# Altium PCB Klon.PcbDoc
Units mil, origin at the board's own origin, x right, y up, seen from the top; angles counter-clockwise.
Board outline 2140 x 2260 mil, 2 copper layers (Top Layer, Bottom Layer); 63 components, 40 nets, 155 pads, 21 vias.
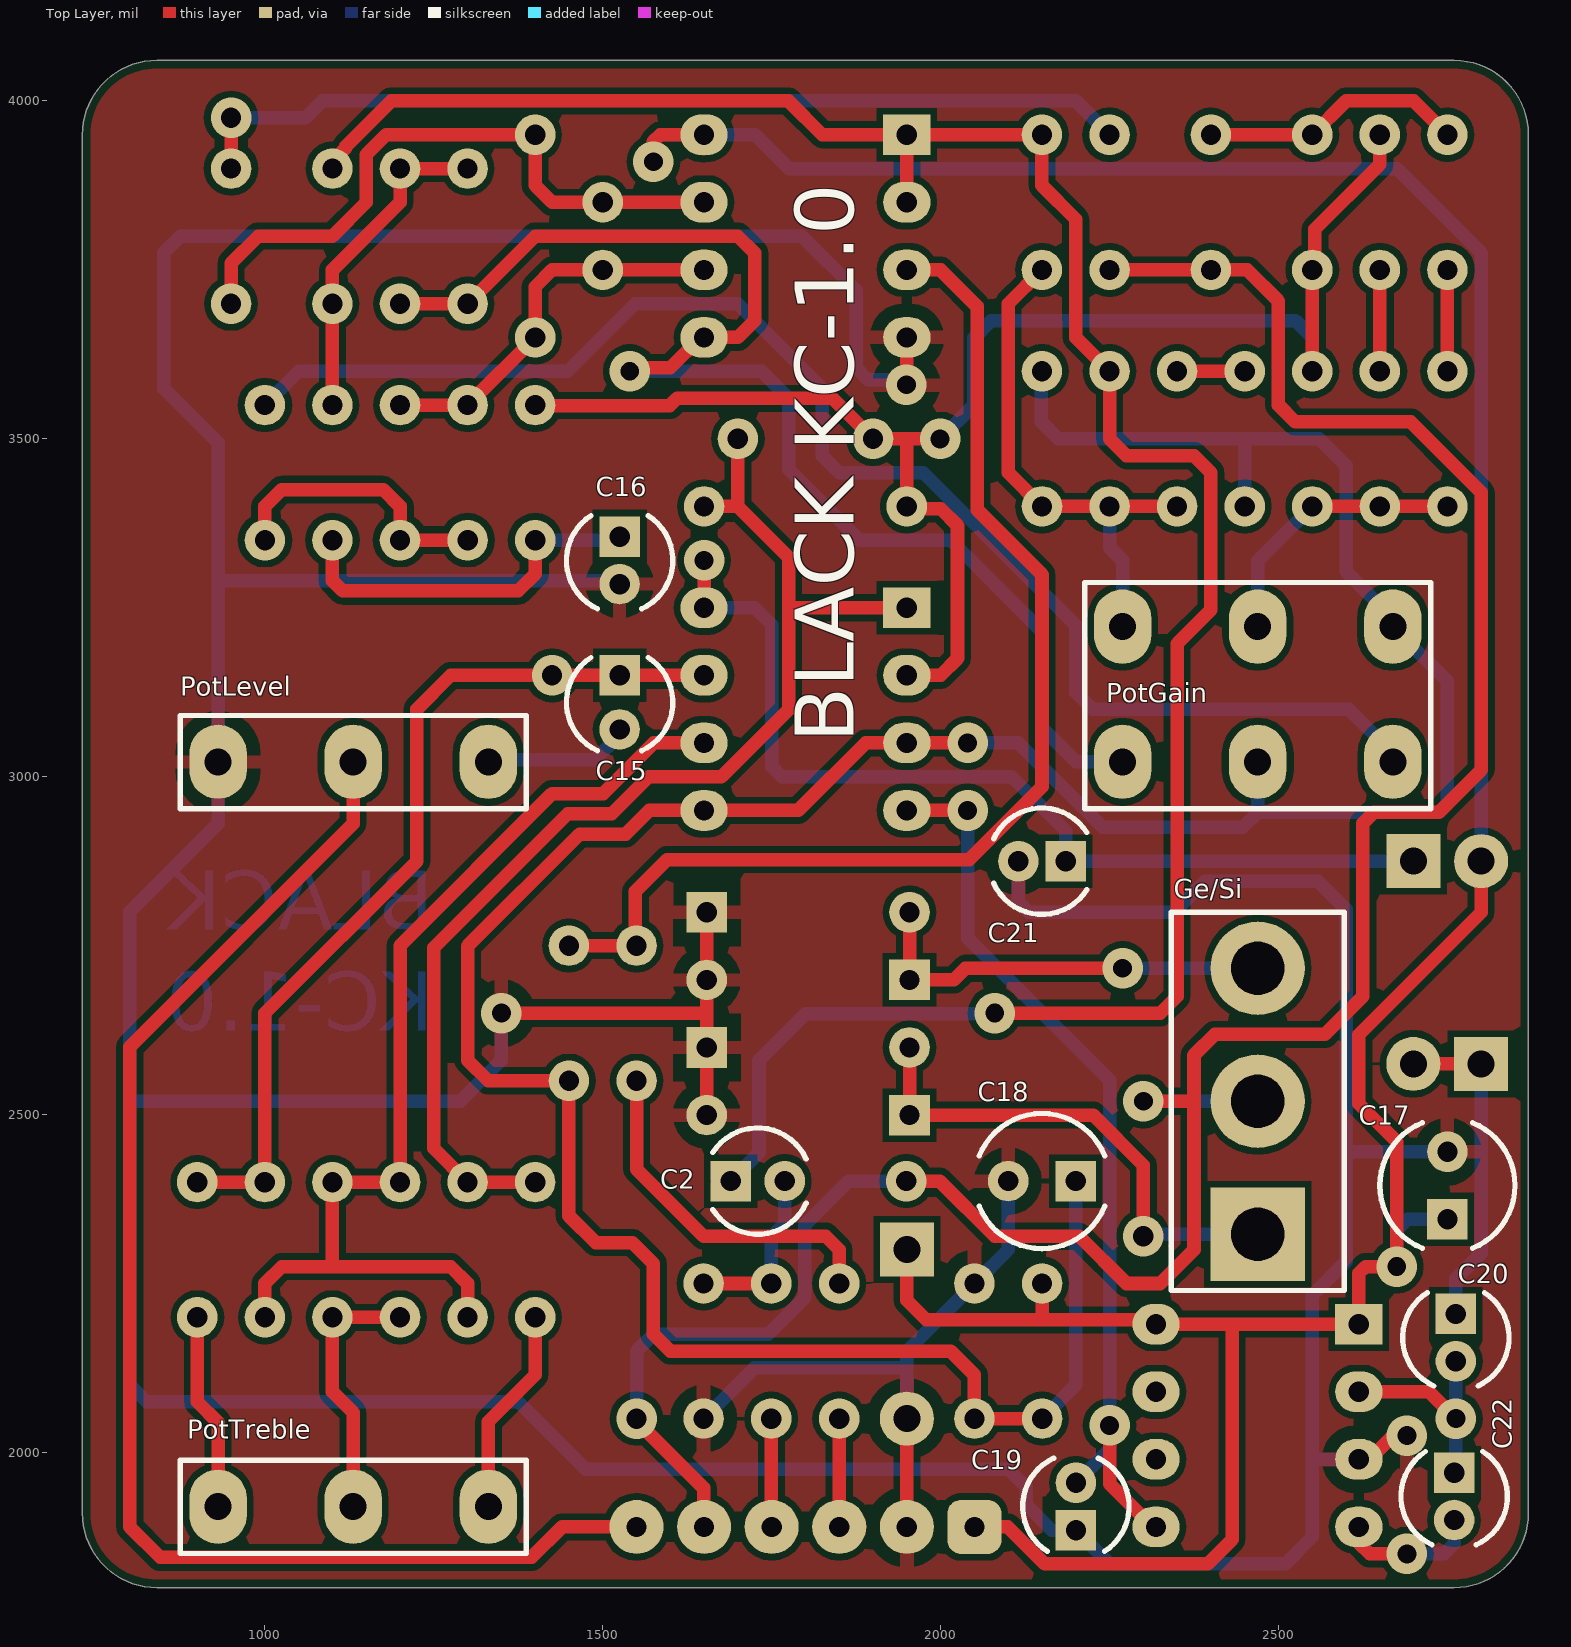
[diagram p0: Top Layer view]
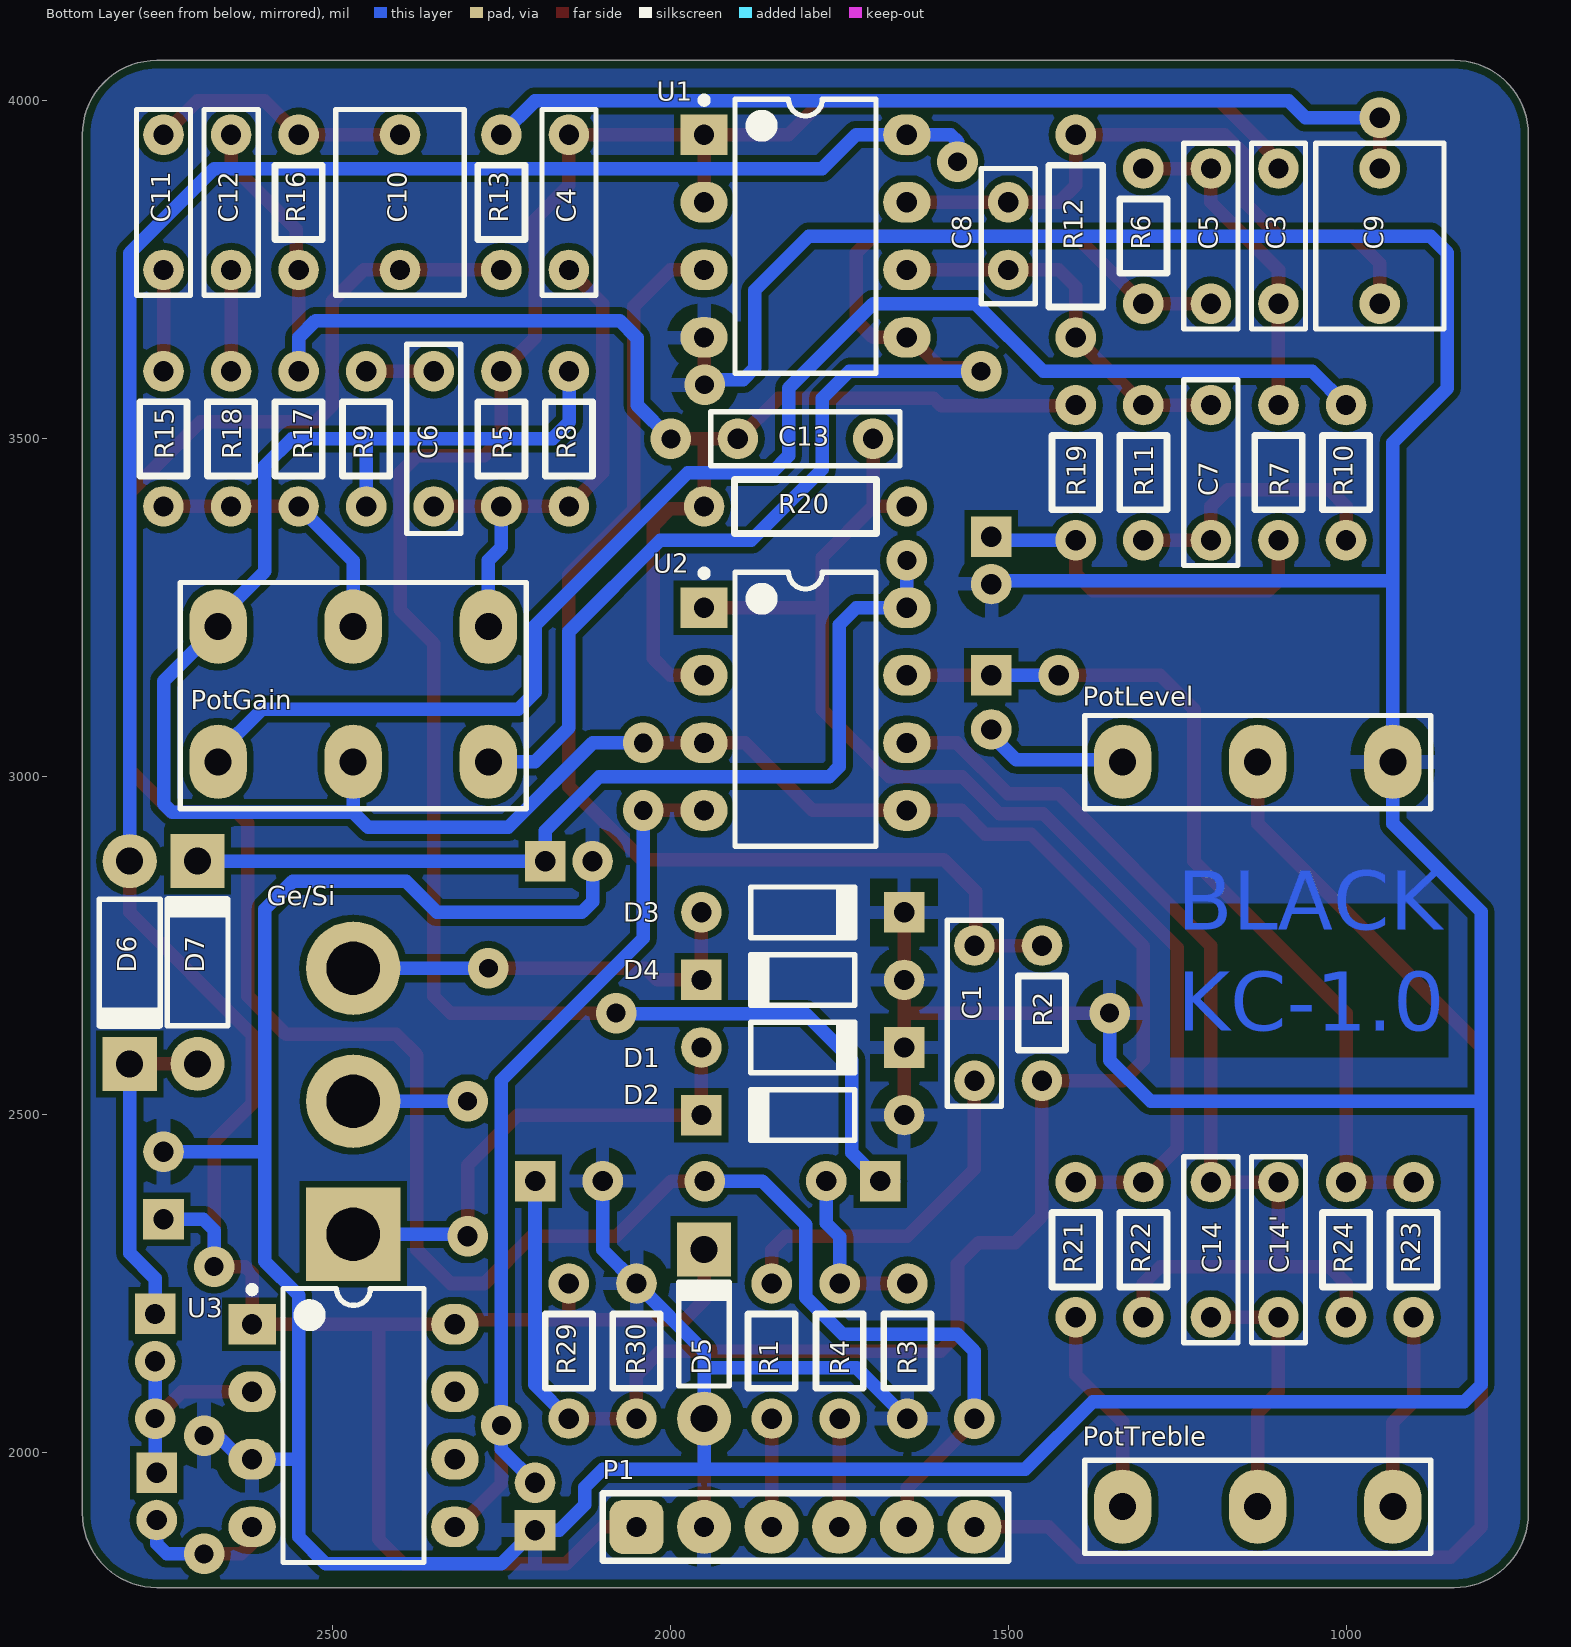
[diagram p1: Bottom Layer view, seen from below]

## Layer stack, top to bottom
Top Solder: solder mask 0.4, Solder Resist, Dk 3.5
Top Layer: signal copper 1.4
Dielectric 1: dielectric 12.6, FR-4, Dk 4.8
Bottom Layer: signal copper 1.4
Bottom Solder: solder mask 0.4, Solder Resist, Dk 3.5

## Board outline
2760,4060 840,4060 ccw(c840,3950) 730,3950 730,1910 ccw(c840,1910) 840,1800 2759.85,1800 ccw(c2760,1910) 2870,1910 2870,3950 ccw(c2760,3950)

## Design rules (kind name [scope] priority, off if disabled: settings)
BoardOutlineClearance [All] p1: gap=12 ignorepadtopadclearanceinfootprint=FALSE
Clearance [All] p1: gap=10 ignorepadtopadclearanceinfootprint=TRUE
ComponentClearance [All] p1: gap=10 collisioncheckmode=3 verticalgap=-10 showdistances=FALSE
Height [All] p1: minheight=0 maxheight=2000 prefheight=500
HoleSize [All] p1: absolutevalues=TRUE maxlimit=100 minlimit=28 maxpercent=80.000 minpercent=20.000
MinimumSolderMaskSliver [All] p1: minsoldermaskwidth=2
PermittedLayers [All] p1: toplayerpermitted=TRUE bottomlayerpermitted=TRUE
PolygonConnect [All] p1: connectstyle=Relief reliefconductorwidth=20 reliefentries=4 polygonreliefangle="90 Angle" airgapwidth=20
RoomDefinition Klon [InComponentClass('Klon')] p1: confinementstyle=ConfineIn formatcopy=TRUE lockcomponents=FALSE outline 395,1535.43 3200,1535.43 3200,4115 395,4115
RoutingCorners [All] p1: cornerstyle=Round minsetback=100 maxsetback=100
RoutingVias [All] p1: holewidth=30 width=60 viastyle="Through Hole" minholewidth=28 minwidth=60 maxholewidth=30 maxwidth=80
SilkToSilkClearance [All] p1: silktosilkclearance=1
SilkToSolderMaskClearance [IsPad] p1: minsilkscreentomaskgap=2 clearancetoexposedcopper=TRUE
SolderMaskExpansion [All] p1: expansion=4
Width [All] p1: maxlimit=20 minlimit=16 preferedwidth=20
23 further rules are at their usual default settings.

## Components (designator, comment, footprint, x,y, rotation, side; value= is the part's Value field where it differs from the comment)
C1 "Cap" "Cap Box 0.2" 1550,2650 r90 bottom value=0.1u
C2 "Cap Pol1" "Cap Pol 80mil" 1729.33,2401.57 r0 top value=4u7
C3 "Cap" "Cap Box 0.2" 1100,3800 r270 bottom value=0.1uF
C4 "Cap" "Cap Box 0.2" 2150,3850 r90 bottom value=68n
C5 "Cap" "Cap Box 0.2" 1200,3800 r90 bottom value=68n
C6 "Cap" "Cap Polyester 200mil" 2350,3500 r270 bottom value=390n
C7 "Cap" "Cap Box 0.2" 1200,3450 r90 bottom value=82n
C8 "Cap" "Cap Ceramic" 1500,3800 r90 bottom value=390p
C9 "Cap" "Cap Box 0.2 FAT H400Mil" 950,3800 r90 bottom value=1uF
C10 "Cap" "Cap Box 0.2 FAT H400Mil" 2400,3850 r90 bottom value=1uF
C11 "Cap" "Cap Box 0.2" 2750,3850 r270 bottom value=2.2n
C12 "Cap" "Cap Box 0.2" 2650,3850 r90 bottom value=27n
C13 "Cap" "Cap Ceramic Multilayer" 1800,3500 r0 bottom value=820p
C14 "Cap" "Cap Box 0.2" 1200,2300 r270 bottom value=3n9
C14' "Cap" "Cap Box 0.2 Socket" 1100,2300 r270 bottom value=3n9
C15 "Cap Pol1" "Cap Pol 80mil" 1525,3110 r270 top value=4u7
C16 "Cap Pol1" "Cap Pol 60mil" 1525,3320 r270 top value=1uF
C17 "Cap Pol1" "Cap Pol 100mil" 2750,2395 r90 top value=47uF
C18 "Cap Pol1" "Cap Pol 100mil" 2150,2401.57 r180 top value=47uF
C19 "Cap Pol1" "Cap Pol 60mil" 2200.24,1920 r90 top value=1uF
C20 "Cap Pol1" "Cap Pol 60mil" 2762.5,2170 r270 top value=1uF
C21 "Cap Pol1" "Cap Pol 60mil" 2150.06,2875 r180 top value=1uF
C22 "Cap Pol1" "Cap Pol 60mil" 2760,1935 r270 top value=1uF
D1 "1N34A" "DO35 Germanio" 1803.99,2599.27 r180 bottom
D2 "1N34A" "DO35 Germanio" 1803.99,2499.27 r0 bottom
D3 "1N4148" DO35 1803.99,2799.27 r180 bottom
D4 "1N4148" DO35 1803.99,2699.27 r0 bottom
D5 "1N4742" "DO41 Zener 250mils" 1950,2175 r90 bottom
D6 "1N4001" DO41 2800,2725 r270 bottom
D7 "1N4001" DO41 2699.53,2725 r90 bottom
Ge/Si "Mod Clipping" "SWITCH SPDT 5mm" 2469.29,2519.68 r180 top
P1 "Header 6" "Header 6" 2050,1889.76 r180 bottom locked
PotGain "RPot Dual Gang" "POT DUAL" 2469.29,3622.05 r0 top locked value=1K
PotLevel "RPot" POT 1130.71,3622.05 r0 top locked value=1K
PotTreble "RPot" POT 1130.71,2519.68 r0 top locked value=1K
R1 "Res1" "Res 0.2" 1850,2050 r90 bottom value=10k
R2 "Res1" "Res 0.2" 1450,2550 r90 bottom value=1Meg
R3 "Res1" "Res 0.2" 1649.27,2050 r90 bottom value=100k
R4 "Res1" "Res 0.2" 1749.33,2050 r90 bottom value=560
R5 "Res1" "Res 0.2" 2250.06,3400 r90 bottom value=5k1
R6 "Res1" "Res 0.2" 1300.06,3700 r90 bottom value=10k
R7 "Res1" "Res 0.2" 1099.94,3550 r270 bottom value=1k5
R8 "Res1" "Res 0.2" 2150,3600 r270 bottom value=1k5
R9 "Res1" "Res 0.2" 2450.06,3400 r90 bottom value=1k
R10 "Res1" "Res 0.2" 1000,3550 r270 bottom value=2k
R11 "Res1" "Res 0.2" 1300,3550 r270 bottom value=15k
R12 "Res1" "Res 0.3" 1400,3950 r270 bottom value=422k
R13 "Res1" "Res 0.2" 2250,3950 r270 bottom value=1K
R15 "Res1" "Res 0.2" 2750.06,3400 r90 bottom value=22k
R16 "Res1" "Res 0.2" 2550.06,3750 r90 bottom value=47k
R17 "Res1" "Res 0.2" 2550.06,3400 r90 bottom value=27k
R18 "Res1" "Res 0.2" 2650.06,3400 r90 bottom value=12k
R19 "Res1" "Res 0.2" 1400,3350 r90 bottom value=15k
R20 "Res1" "Res 0.3" 1650,3400 r0 bottom value=392k
R21 "Res1" "Res 0.2" 1400,2200 r90 bottom value=1k8
R22 "Res1" "Res 0.2" 1300,2200 r90 bottom value=100k
R23 "Res1" "Res 0.2" 900,2400 r270 bottom value=4k7
R24 "Res1" "Res 0.2" 1000,2400 r270 bottom value=100k
R29 "Res1" "Res 0.2" 2150.24,2050 r90 bottom value=27k
R30 "Res1" "Res 0.2" 2050.06,2250 r270 bottom value=27k
U1 "TL072P" DIP8 1800,3800 r180 bottom
U2 "TL072P" DIP8 1800,3100 r180 bottom
U3 "MAX1044" DIP8 2468.9,2039.76 r180 bottom value=Value

## Footprints (in the part's own frame and the unit in brackets; to place one, negate y for a bottom-side part, rotate by r counter-clockwise, add the part's x,y. Pads: shape width x height; smd on the part's side, far side on the other; paste and mask are expansions set on the pad)
"Cap Box 0.2" [mil]
  round 60 hole 30: 1(-100,0) 2(100,0)
  silkscreen extent -138,-40 138,40, body extent -138,-40 138,40, height 240
"Cap Box 0.2 FAT H400Mil" [mil]
  round 60 hole 30: 1(-100,0.01) 2(100,0.01)
  silkscreen extent -138,-95 138,95, body extent -138,-95 138,95, height 400
"Cap Box 0.2 Socket" [mil]
  round 60 hole 30: 1(-100,0) 2(100,0)
  silkscreen extent -138,-40 138,40, body extent -120,-20 120,20, height 61
"Cap Ceramic" [mil]
  round 60 hole 30: 1(-50,0) 2(50,0)
  silkscreen extent -100,-40 100,40, body extent -60,-13 60,12, height 100
"Cap Ceramic Multilayer" [mil]
  round 60 hole 30: 1(-100,0) 2(100,0)
  silkscreen extent -140,-40 140,40, body extent -110,-20 110,20, height 185
"Cap Pol 60mil" [mil]
  rect 60x60 hole 30: 1(-35,0)
  round 60 hole 30: 2(35,0)
  silkscreen extent -66,-79 72,79, body extent -78,-78 80,78, height 438
"Cap Pol 80mil" [mil]
  rect 60x60 hole 30: 1(-40,0)
  round 60 hole 30: 2(40,0)
  silkscreen extent -66,-79 72,79, body extent -78,-78 80,78, height 438
"Cap Pol 100mil" [mil]
  rect 60x60 hole 30: 1(-50,0)
  round 60 hole 30: 2(50,0)
  silkscreen extent -93,-100 93,100, body extent -100,-100 102,100, height 438
"Cap Polyester 200mil" [mil]
  round 60 hole 30: 1(-100,0) 2(100,0)
  silkscreen extent -140,-40 140,40, body extent -114,-40 114,40, height 300
DIP8 [mil]
  rect 70x60 hole 30: 1(-150,150)
  oval 70x60 hole 30: 2(-150,50) 3(-150,-50) 4(-150,-150) 5(150,-150) 6(150,-50) 7(150,50) 8(150,150)
  silkscreen extent -155,-203 104,206, body extent -155,-203 155,203, height 190
DO35 [mil]
  round 60 hole 30: 1(-150,0)
  rect 60x60 hole 30: 2(150,0)
  silkscreen extent -77,-37 81,37, body extent -160,-40 160,40, height 80
"DO35 Germanio" [mil]
  round 60 hole 30: 1(-150,0)
  rect 60x60 hole 30: 2(150,0)
  silkscreen extent -77,-37 81,37, body extent -160,-40 160,40, height 80
DO41 [mil]
  round 80 hole 40: 1(-150,0)
  rect 80x80 hole 40: 2(150,0)
  silkscreen extent -93,-45 98,45, body extent -165,-48 165,48, height 103
"DO41 Zener 250mils" [mil]
  round 80 hole 40: 1(-125,0)
  rect 80x80 hole 40: 2(125,0)
  silkscreen extent -77,-37 81,38, body extent -140,-50 140,50, height 90
"Header 6" [mil]
  rrect50% 80x80 hole 30: 1(0,0)
  round 80 hole 30: 2(100,0) 3(200,0) 4(300,0) 5(400,0) 6(500,0)
  silkscreen extent -50,-50 550,50, body extent -50,-50 550,50, height 400
POT [mil]
  oval 85x110 hole 40: 1(-200,-600) 2(0,-600) 3(200,-600)
  silkscreen extent -256,-669 256,-531, body extent -400,-607 400,400, height 1202
"POT DUAL" [mil]
  oval 85x110 hole 40: 1(-200,-600) 2(0,-600) 3(200,-600) 4(-200,-400) 5(0,-400) 6(200,-400)
  silkscreen extent -256,-669 256,-335, body extent -400,-607 400,400, height 1202
"Res 0.2" [mil]
  round 60 hole 30: 1(0,0) 2(200,-0.06)
  silkscreen extent 45,-35 155,35, body extent -10,-25 210,25, height 55
"Res 0.3" [mil]
  round 60 hole 30: 1(0,0) 2(300,0)
  silkscreen extent 45,-40 255,40, body extent -10,-30 310,30, height 65
"SWITCH SPDT 5mm" [mm]
  rect 3.54x3.5 hole 2: 1(0,5)
  oval 3.54x3.5 hole 2: 2(0,0) 3(0,-5)
  silkscreen extent -3.25,-7.11 3.25,7.11, body extent -3,-6 3,6, height 28

## Part data
C1 C3 C4 C5 C6 C7 C8 C9 C10 C11 C12 C13 C14 C14': "Capacitor", ClassName=Klon, LatestRevisionDate=17-Jul-2002, LatestRevisionNote="Re-released for DXP Platform.", PackageDescription="Radial Cap, Thru-Hole; 2 Leads; 0.3 in Pin Spacing", PackageReference=RAD-0.3, Published=8-Jun-2000, Publisher="Altium Limited"
C2 C15 C16 C17 C18 C19 C20 C21 C22: "Polarized Capacitor (Radial)", ClassName=Klon, LatestRevisionDate=17-Jul-2002, LatestRevisionNote="Re-released for DXP Platform.", PackageDescription="Polarized Capacitor (Radial); 2 Leads", PackageReference=RB7.6-15, Published=8-Jun-2000, Publisher="Altium Limited"
D1 D2 D3 D4: library part "Diode 1N4148", "High Conductance Fast Diode", ClassName=Klon, Code_JEDEC=DO-204-AH, ComponentLink1Description="Manufacturer Link", ComponentLink1URL=http://www.fairchildsemi.com/, ComponentLink2Description=Datasheet, ComponentLink2URL=http://www.fairchildsemi.com/ds/1N%2F1N4148.pdf, DatasheetVersion=1997, LatestRevisionDate=17-Jul-2002, LatestRevisionNote="Re-released for DXP Platform.", PackageDescription="Diode, Axial; Body 3.8 x 1.9 mm (LxDia. max), Lead Dia. 0.53 mm (max)", PackageReference=DO-35, Published=8-Jun-2000, Publisher="Altium Limited"
D5: library part "D Zener", "Zener Diode", ClassName=Klon, LatestRevisionDate=17-Jul-2002, LatestRevisionNote="Re-released for DXP Platform.", PackageDescription="Diode, Thru-Hole; 2 Leads; 0.7 in Pin Spacing", PackageReference=DIODE-0.7, Published=8-Jun-2000, Publisher="Altium Limited"
D6 D7: library part "Diode 1N4001", "1 Amp General Purpose Rectifier", ClassName=Klon, Code_JEDEC=DO-204-AL, ComponentLink1Description="Manufacturer Link", ComponentLink1URL=http://www.fairchildsemi.com/, ComponentLink2Description=Datasheet, ComponentLink2URL=http://www.fairchildsemi.com/ds/1N%2F1N4001.pdf, DatasheetVersion=1998, LatestRevisionDate=17-Jul-2002, LatestRevisionNote="Re-released for DXP Platform.", PackageDescription="Diode, Axial; Body 5.2 x 2.7 mm (LxDia. max), Lead Dia. 0.86 mm (max)", PackageReference=DO-41, PackageVersion=Aug-1999, Published=8-Jun-2000, Publisher="Altium Limited"
Ge/Si: library part SW-SPDT, "SPDT Subminiature Toggle Switch, Right Angle Mounting, Vertical Actuation", ComponentLink1Description="Manufacturer Link", ComponentLink1URL=http://www.apem.com, DatasheetVersion=05-Dec-2000, LatestRevisionDate=17-Dec-2003, LatestRevisionNote="Schematic revised, PCB Footprint replaced.", PackageDescription="Switch; 4 Leads", PackageReference=TL36WW15050, Published=24-Mar-1999, Publisher="Altium Limited"
P1: "Header, 6-Pin", LatestRevisionDate=17-Jul-2002, LatestRevisionNote="Re-released for DXP Platform.", Publisher="Altium Limited"
PotGain PotLevel PotTreble: "Potentiometer", LatestRevisionDate=17-Jul-2002, LatestRevisionNote="Re-released for DXP Platform.", PackageDescription="Variable Resistor, Thru-Hole; 3 Leads", PackageReference=VR5, Published=8-Jun-2000, Publisher="Altium Limited", Set Position=0.5, Sim Note="Enter the Resistance value and the set point into parameter fields."
R1 R2 R3 R4 R5 R6 R7 R8 R9 R10 R11 R12 R13 R15 R16 R17 R18 R19 R20 R21 R22 R23 R24 R29 R30: "Resistor", ClassName=Klon, LatestRevisionDate=17-Jul-2002, LatestRevisionNote="Re-released for DXP Platform.", PackageDescription="Axial Device, Thru-Hole; 2 Leads; 0.3 in Pin Spacing", PackageReference=AXIAL-0.3, Published=8-Jun-2000, Publisher="Altium Limited"
U1 U2: "Low-Noise JFET-Input Operational Amplifier", ClassName=Klon, Code_JEDEC=MO-001-AN, ComponentLink1Description="Manufacturer Link", ComponentLink1URL=http://www.ti.com/, ComponentLink2Description=Datasheet, ComponentLink2URL=http://www-s.ti.com/sc/ds/tl072.pdf, DatasheetVersion=Aug-1996, LatestRevisionDate=04-Mar-2005, LatestRevisionNote="Stylized 3D Model Added.", PackageDescription="DIP; 8 Leads; Row Spacing 7.62 mm; Pitch 2.54 mm", PackageReference=P008, PackageVersion=Jun-1999, Published=16-Jan-2001, Publisher="Altium Limited"
U3: library part max1044epa+, "No Description Available", Built_By=EMA_UL_Team, ClassName=Klon, Copyright="Copyright (C) 2018 Accelerated Designs. All rights reserved", Manufacturer_Part_Number=max1044epa+, RefDes=RefDes, Type=DEV, Vendor="Maxim Integrated Products"

## Via types
v1: diameter 60, hole 28, Top Layer to Bottom Layer, 16 vias
v2: diameter 60, hole 30, Top Layer to Bottom Layer, 5 vias

## Nets (pads, with @x,y where several pads share a name; then routed paths per layer and width w, separated by ;. In a path a pad name is that pad's centre, name@x,y a point inside that pad or via, vN(x,y) a via of type N, cw(c..) or ccw(c..) an arc to the next point about the centre after c; other vN are vias at no path point)
4V5: C18.1 PotGain.2 PotGain.6 R2.1 R8.1 R9.1 R29.1 R30.2 U2.3 U2.5 | length 4758.2
  Top Layer w20: v1(2040,3050) U2.3 1889.07,3050 1789.07,2950 U2.5 1568.75,2950 1533.75,2915 1465.67,2915 1300,2749.33 1300,2580.59 1330.59,2550 R2.1 1450,2350 1489.46,2310.54 1543.75,2310.54 1575,2279.29 1575,2174.94 1599.94,2150 2014.76,2150 2050.12,2114.64 R30.2 R29.1
  Bottom Layer w20: v1(2040,3050) 2115,3050 2240,2925 2447.24,2925 2469.29,2947.05 ; R8.1 2149.27,3599.27 2149.27,3525 2174.27,3500 2450,3500 ; R29.1 2200.24,2100 2200.24,2401.33 C18.1 ; R9.1 2450.06,3499.94 2450,3500 ; PotGain.2 2469.29,2947.05 ; 2450,3500 2560,3500 2600,3460 2600,3455 2600.06,3454.94 2600.06,3303.78 2669.29,3234.55 PotGain.6 2750,3141.34 2750,2960 2737.05,2947.05 2469.29,2947.05
9V: C17.1 D5.2 D6.1 P1.1 R29.2 U1.8 U3.1 U3.8 | length 4927.1
  Top Layer w20: v1(1575,3910) 1575,3940 1585,3950 1628.55,3950 1649.27,3929.27 U1.8@1649.27,3950 ; D5.2 1950,2225 1978.72,2196.28 2150.18,2196.28 ; P1.1 2099.51,1889.76 2154.28,1835 2395.24,1835 2431.5,1871.26 2431.5,2189.76 ; R29.2 2150.18,2196.28 ; D6.1 2800,2799.27 2618.9,2618.17 2618.9,2516.1 2675,2460 v1(2675,2275) 2628.9,2275 2618.9,2265 U3.1 2431.5,2189.76 ; 2150.18,2196.28 2312.38,2196.28 U3.8 2431.5,2189.76
  Bottom Layer w20: v1(1575,3910) 1575,3940 1585,3950 1630,3950 1650,3930 U1.8 1650.24,3950.24 1725,3950.24 1775.24,3900 1810,3900 2675,3900 2800.06,3774.94 D6.1@2800.06,2875 ; v1(2675,2275) 2675,2329 2691,2345 C17.1 C17.1@2760,2345
16V2: C21.1 D7.2 U2.8 | length 1494.7
  Top Layer w20: U2.8@1649.21,3250 1650,3250.79 v1(1650,3320)
  Bottom Layer w20: v1(1650,3320) U2.8 1725,3250 1750,3225 1750,3015 1765,3000 2105.24,3000 2185.06,2920.18 C21.1 D7.2
"Gain clean MAX": C4.1 C6.2 PotGain.4 R5.1 R8.2 | length 777.4
  Top Layer w20: C4.1 2100,3700 2100,3450.06 R8.2 R5.1 ; R5.1@2250,3399.94 R5.1 ; C6.2 R5.1
  Bottom Layer w20: R5.1 2250.06,3339.23 2269.29,3320 PotGain.4
"Gain clean TAP": PotGain.5 R15.1 R17.1 R18.1 | length 411.4
  Top Layer w20: R17.1 R18.1 R15.1
  Bottom Layer w20: PotGain.5 2469.29,3319.23 R17.1
"Gain dirty MAX": PotGain.3 R10.1 | length 2136.3
  Bottom Layer w20: R10.1 1050,3600 1448.28,3600 1548.28,3700 1700,3700 1825,3575 1825,3475 1850,3450 1974.27,3450 2200,3224.27 2200,3125 2225,3100 2603.84,3100 2669.29,3034.55 PotGain.3
"Gain dirty MIN": C5.1 PotGain.1 R6.1 U1.5 | length 1998.4
  Top Layer w20: C5.1 R6.1 ; R6.1@1300.03,3700.03 1400,3800 1479.29,3800 1587.14,3800 1700,3800 1725,3775 1725,3675 1700,3650 1644.84,3650 1600,3605.16 1545.16,3605.16 v1(1540,3600)
  Bottom Layer w20: v1@1548.28,3600 1735,3600 1775,3560 1775,3455 1880,3350 2015,3350 2150.06,3214.94 2150.06,3072.23 2200.24,3022.05 PotGain.1
GND: C16.2 C17.2 C18.2 C19.1 C21.2 D1.2 D2.1 D3.2 D4.1 D5.1 P1.2 PotLevel.1 R3.1 R30.1 U1.4 U3.3 | length 9737.6
  Top Layer w20: v1(1350,2650) 1653.99,2650 ; D2.1 D1.2 1653.99,2650 ; D3.2 D4.1 1653.99,2650 ; v1(1949.27,3580) 1950,3580.73 U1.4 ; P1.2 D5.1 ; U3.3 2634.72,1989.76 2669.96,2025 v1(2690,2025)
  Bottom Layer w20: v1(1350,2650) 1350,2580.53 1289.15,2519.68 800,2519.68 ; C16.2@1519,3290 930.71,3290 ; R3.1 1724.27,2125 1950,2125 ; v1(1949.27,3580) 1941.62,3587.65 1892.35,3587.65 1875,3605 1875,3720 1795,3800 1520.72,3800 1197.86,3800 875,3800 850,3775 850,3575 930.71,3494.29 930.71,3290 ; C18.2 2100,2299.94 R30.1 1950,2149.94 1950,2125 ; C21.2 2115,2874.94 2115,2815 2130.73,2799.27 2345.26,2799.27 2390.98,2845 2559.02,2845 2600,2804.02 2600,2445 ; v1(2690,2025) 2682.35,2017.35 2662.3,2017.35 2634.72,1989.76 U3.3 2550,1989.76 ; C17.2 2600,2445 ; 800,2519.68 800,2800 930.71,2930.71 PotLevel.1 930.71,3290 ; 800,2519.68 800,2100 825,2075 1375,2075 1475,1975 1950,1975 ; 1950,1975 2100,1975 2126.57,1948.43 2126.57,1922.7 2164.27,1885 C19.1 2250.24,1835 2510,1835 2550,1875 2550,1989.76 ; 1950,1975 D5.1 1950,2125 ; 2550,1989.76 2550,2232.66 2600,2282.66 2600,2435 2600,2445
GROUND_ON_CLEAN: C10.1 Ge/Si.2 P1.5 R13.2 | length 3843.8
  Top Layer w20: v2(1550,2050) 1550,2046.64 1649.21,1947.42 1649.21,1890.55 P1.5 ; v2(1949.27,2401.57) 1998.43,2401.57 2080.07,2319.93 2205.07,2319.93 2275,2250 2325,2250 2375,2300 2375,2519.68 ; R13.2 C10.1 2453.9,3750 2500,3703.9 2500,3550 2525,3525 2695.77,3525 2800.06,3420.71 2800.06,3010.06 2737.05,2947.05 2640.95,2947.05 2625,2931.1 2625,2675 2568.58,2618.58 2405.53,2618.58 2375,2588.05 2375,2519.68 ; v1(2300,2519.68) 2375,2519.68
  Bottom Layer w20: v2@1550,2052.95 1550,2150 1575,2175 1744.99,2175 1799.27,2229.29 1799.27,2336.77 1864.07,2401.57 v2(1949.27,2401.57) ; v1(2300,2519.68) Ge/Si.2
INPUT: P1.3 R1.1 | length 160.2
  Top Layer w20: P1.3 R1.1
NEG8V6: C19.2 U2.4 U3.5 | length 1378
  Top Layer w20: U2.4 v1(2040,2950) ; v1(2250,2040) 2250,1953.66 2313.9,1889.76 U3.5
  Bottom Layer w20: v1(2040,2950) 2040,2760.79 2250,2550.79 v1(2250,2040) 2250,2004.76 C19.2 ; U3.5@2315.24,1889.76 U3.5
NetC1_1: C1.1 R1.2 | length 530.1
  Top Layer w20: C1.1 1550,2419.21 1649.21,2320 1829.94,2320 1849.94,2300 R1.2
NetC1_2: C1.2 R2.2 U1.3 | length 1723.2
  Top Layer w20: R2.2 C1.2@1548.28,2750 ; C1.2 C1.2@1548.28,2750 ; U1.3 1999.97,3750 2053.99,3695.98 2053.99,3395.29 2150.06,3299.21 2150.06,2985.06 2042.35,2877.35 1595.48,2877.35 1548.28,2830.15 C1.2@1548.28,2750
NetC2_1: C2.1 C3.1 C4.2 R5.2 U1.1 U1.2 | length 3551.9
  Top Layer w20: C3.1 1100,3910.82 1120,3930.82 1120,3933.14 1186.86,4000 1775,4000 1825,3950 U1.1 ; U1.2 U1.1 ; v1(2080.07,2650) 2325,2650 2350,2675 2350,3197.05 2400.01,3247.06 2400.01,3450 2375.01,3475 2275,3475 2250,3500 R5.2 2200.24,3649.76 2200.24,3675 2200,3675.24 2200,3825 2150,3875 C4.2 U1.1
  Bottom Layer w20: C2.1@1669.33,2401.57 C2.1 1731.26,2443.5 1731.26,2580.53 1800,2649.27 2079.35,2649.27 v1(2080.07,2650)
NetC2_2: C2.2 R3.2 R4.2 | length 260
  Top Layer w20: R3.2 R4.2
  Bottom Layer w20: R4.2 1749.27,2319.27 1769.33,2339.33 C2.2
NetC3_2: C3.2 C5.2 R6.2 R7.1 | length 541.5
  Top Layer w20: R7.1@1099.97,3550.03 C3.2 C3.2 ; R6.2 C5.2 1200,3850 1099.97,3749.97 ; C3.2 1099.97,3749.97 ; C3.2@1099.94,3700.06 1099.94,3749.94
NetC6_1: C6.1 R9.2 | length 100
  Top Layer w20: C6.1 R9.2
NetC7_1: C7.1 R10.2 R11.2 | length 420.8
  Top Layer w20: R10.2 1000,3350.06 1000,3400 1025,3425 1175,3425 1200,3400 C7.1 R11.2
NetC7_2: C7.2 C8.1 R11.1 R12.2 U1.6 | length 576.8
  Top Layer w20: C7.2 R11.1 R12.2 1400,3725 1425,3750 C8.1 U1.6
NetC8_2: C8.2 C9.1 R12.1 U1.7 | length 965.5
  Top Layer w20: C9.1 950.01,3760 990.01,3800 1100,3800 1150,3850 1150,3920.71 1179.29,3950 R12.1 1400,3875 1425,3850 C8.2 U1.7
NetC9_2: C9.2 R13.1 | length 1406.2
  Top Layer w20: C9.2 v2(950,3975)
  Bottom Layer w20: v2(950,3975) 1060,3975 1085,4000 2200.24,4000 2250,3950.24 R13.1
NetC10_2: C10.2 C11.1 R16.2 | length 391.4
  Top Layer w20: C10.2 R16.2 2600,4000 2700,4000 C11.1
NetC11_2: C11.2 R15.2 | length 150
  Top Layer w20: R15.2 C11.2
NetC12_1: C12.1 R18.2 | length 150
  Top Layer w20: R18.2 C12.1
NetC12_2: C12.2 C13.2 R16.1 R17.2 R19.2 R20.2 U2.2 | length 2231.6
  Top Layer w20: R19.2 1400.67,3549.27 1599.27,3549.27 1610,3560 1840,3560 C13.2 1950,3500 ; U2.2 2000,3150 2025,3175 2025,3371.72 2000,3396.72 1953.28,3396.72 R20.2 1950,3500 ; v1(1999.27,3500) 1950,3500 ; R17.2 R16.1@2550.03,3749.97 ; R16.1 2553.9,3753.84 2553.9,3810 2650,3906.1 C12.2
  Bottom Layer w20: v1@2000,3500 v1(1999.27,3500) 2049.27,3550 2049.27,3649.27 2075,3675 2525.06,3675 2550,3650.06 R17.2
NetC13_1: C13.1 R20.1 R21.2 R22.2 U2.1 | length 1787.7
  Top Layer w20: R21.2 R22.2 1250,2449.94 1250,2746.71 1448.29,2945 1513.14,2945 1568.14,3000 1675.71,3000 1775,3099.29 1775,3250 ; R20.1 1692.43,3400 ; C13.1 1700,3400 1699.94,3400 1775,3324.94 1775,3250 ; U2.1 1775,3250
NetC14'_1: C14'.1 C14.1 R22.1 R24.2 U2.6 | length 1570
  Top Layer w20: R24.2 1000,2200.06 1000,2250 1025,2275 1100,2275 ; R22.1 1300,2250.06 1275.06,2275 1100,2275 ; U2.6 1575.71,3050 1500.71,2975 1425.06,2975 1200,2749.94 C14.1 C14'.1 1100,2275
NetC15_1: C15.1 R23.1 R24.1 U2.7 | length 1438.9
  Top Layer w20: R23.1 R24.1 1000,2650 1225,2875 1225,3100 1275,3150 v2(1425,3150) U2.7
  Bottom Layer w20: v2(1425,3150) C15.1
NetC16_1: C16.1 R7.2 R19.1 | length 552.9
  Top Layer w20: R7.2 1100.01,3290 1115.01,3275 1375,3275 1400,3300 R19.1
  Bottom Layer w20: R19.1 1512.93,3350 ccw(c1512.93,3367.07) C16.1
NetC20_1: C20.1 D6.2 D7.1 | length 485.5
  Top Layer w20: D7.1@2700,2575 D6.2
  Bottom Layer w20: C20.1 2762.5,2257.5 2800,2295 D6.2
NetC20_2: C20.2 C22.1 U3.2 | length 326.1
  Top Layer w20: U3.2 2722.74,2089.76 v1(2762.5,2050)
  Bottom Layer w20: C22.1 2762.5,1972.5 v1(2762.5,2050) C20.2
NetC22_2: C22.2 U3.4 | length 212.6
  Top Layer w20: U3.4 2618.9,1866.1 2635,1850 v1(2690,1850)
  Bottom Layer w20: v1(2690,1850) 2745,1850 2760,1865 C22.2
NetD1_1: D1.1 D2.2 Ge/Si.1 | length 752.2
  Top Layer w20: D1.1 D2.2 2225.73,2499.27 2300,2425 v2(2300,2320)
  Bottom Layer w20: v2(2300,2320) 2302.83,2322.83 Ge/Si.1
NetD3_1: D3.1 D4.2 Ge/Si.3 | length 622.5
  Top Layer w20: D3.1 D4.2 2019.46,2699.27 2036.72,2716.54 v1(2269.29,2716.54)
  Bottom Layer w20: v1(2269.29,2716.54) Ge/Si.3
OUTPUT_CLEAN: P1.4 R4.1 | length 160.5
  Top Layer w20: R4.1 1749.67,2049.67 1749.67,1890.1 P1.4
OUTPUT_FX: P1.6 PotLevel.2 | length 2056.6
  Top Layer w20: PotLevel.2 1130.71,2930.7 800,2599.99 800,1889.76 845.08,1844.69 1394.69,1844.69 1439.76,1889.76 P1.6
"Treble MAX": PotTreble.3 R21.1 | length 309
  Top Layer w20: PotTreble.3 1330.71,2045.47 1400,2114.76 R21.1
"Treble MIN": PotTreble.1 R23.2 | length 293
  Top Layer w20: R23.2 900.06,2074.94 930.71,2044.29 PotTreble.1
"Treble TAP": C14'.2 C14.2 PotTreble.2 | length 393
  Top Layer w20: PotTreble.2 1130.71,2059.06 1100,2089.76 C14'.2 C14.2
"Vol MAX": C15.2 PotLevel.3 | length 222
  Top Layer w20: PotLevel.3 PotLevel.3@1333.66,3025
  Bottom Layer w20: PotLevel.3@1330.71,3025 1488.28,3025 1525,3061.72 C15.2
pads on no net: U3.6 U3.7

## Polygon pours and split planes (outlines as drawn)
GND on Top Layer "Top GND" (solid, pour order 2): 2900,4050 725,4050 725,1800 2900,1800
GND on Bottom Layer "Bottom GND " (solid, pour order 0): 2900,4050 725,4050 725,1800 2900,1800

## Other copper
Bottom Layer:
  text "BLACK / KC-1.0" at 1250,2595 h150

## Silkscreen, mask and mechanical layers (free items; w line width, h text height)
Top Overlay:
  text "BLACK KC-1.0" at 1900,3050 h150 r90
Bottom Overlay:
  text "PotLevel" at 1390,3105 h28
  text "PotGain" at 2710,3100 h28
  text "Ge/Si" at 2597.24,2810 h28
  text "PotTreble" at 1390,2010 h28